# Altium PCB board.PcbDoc
Units mil, origin at the board's own origin, x right, y up, seen from the top; angles counter-clockwise.
Board outline 2617 x 2703.66 mil, 2 copper layers (Top Layer, Bottom Layer); 17 components, 8 nets, 83 pads, 0 vias.
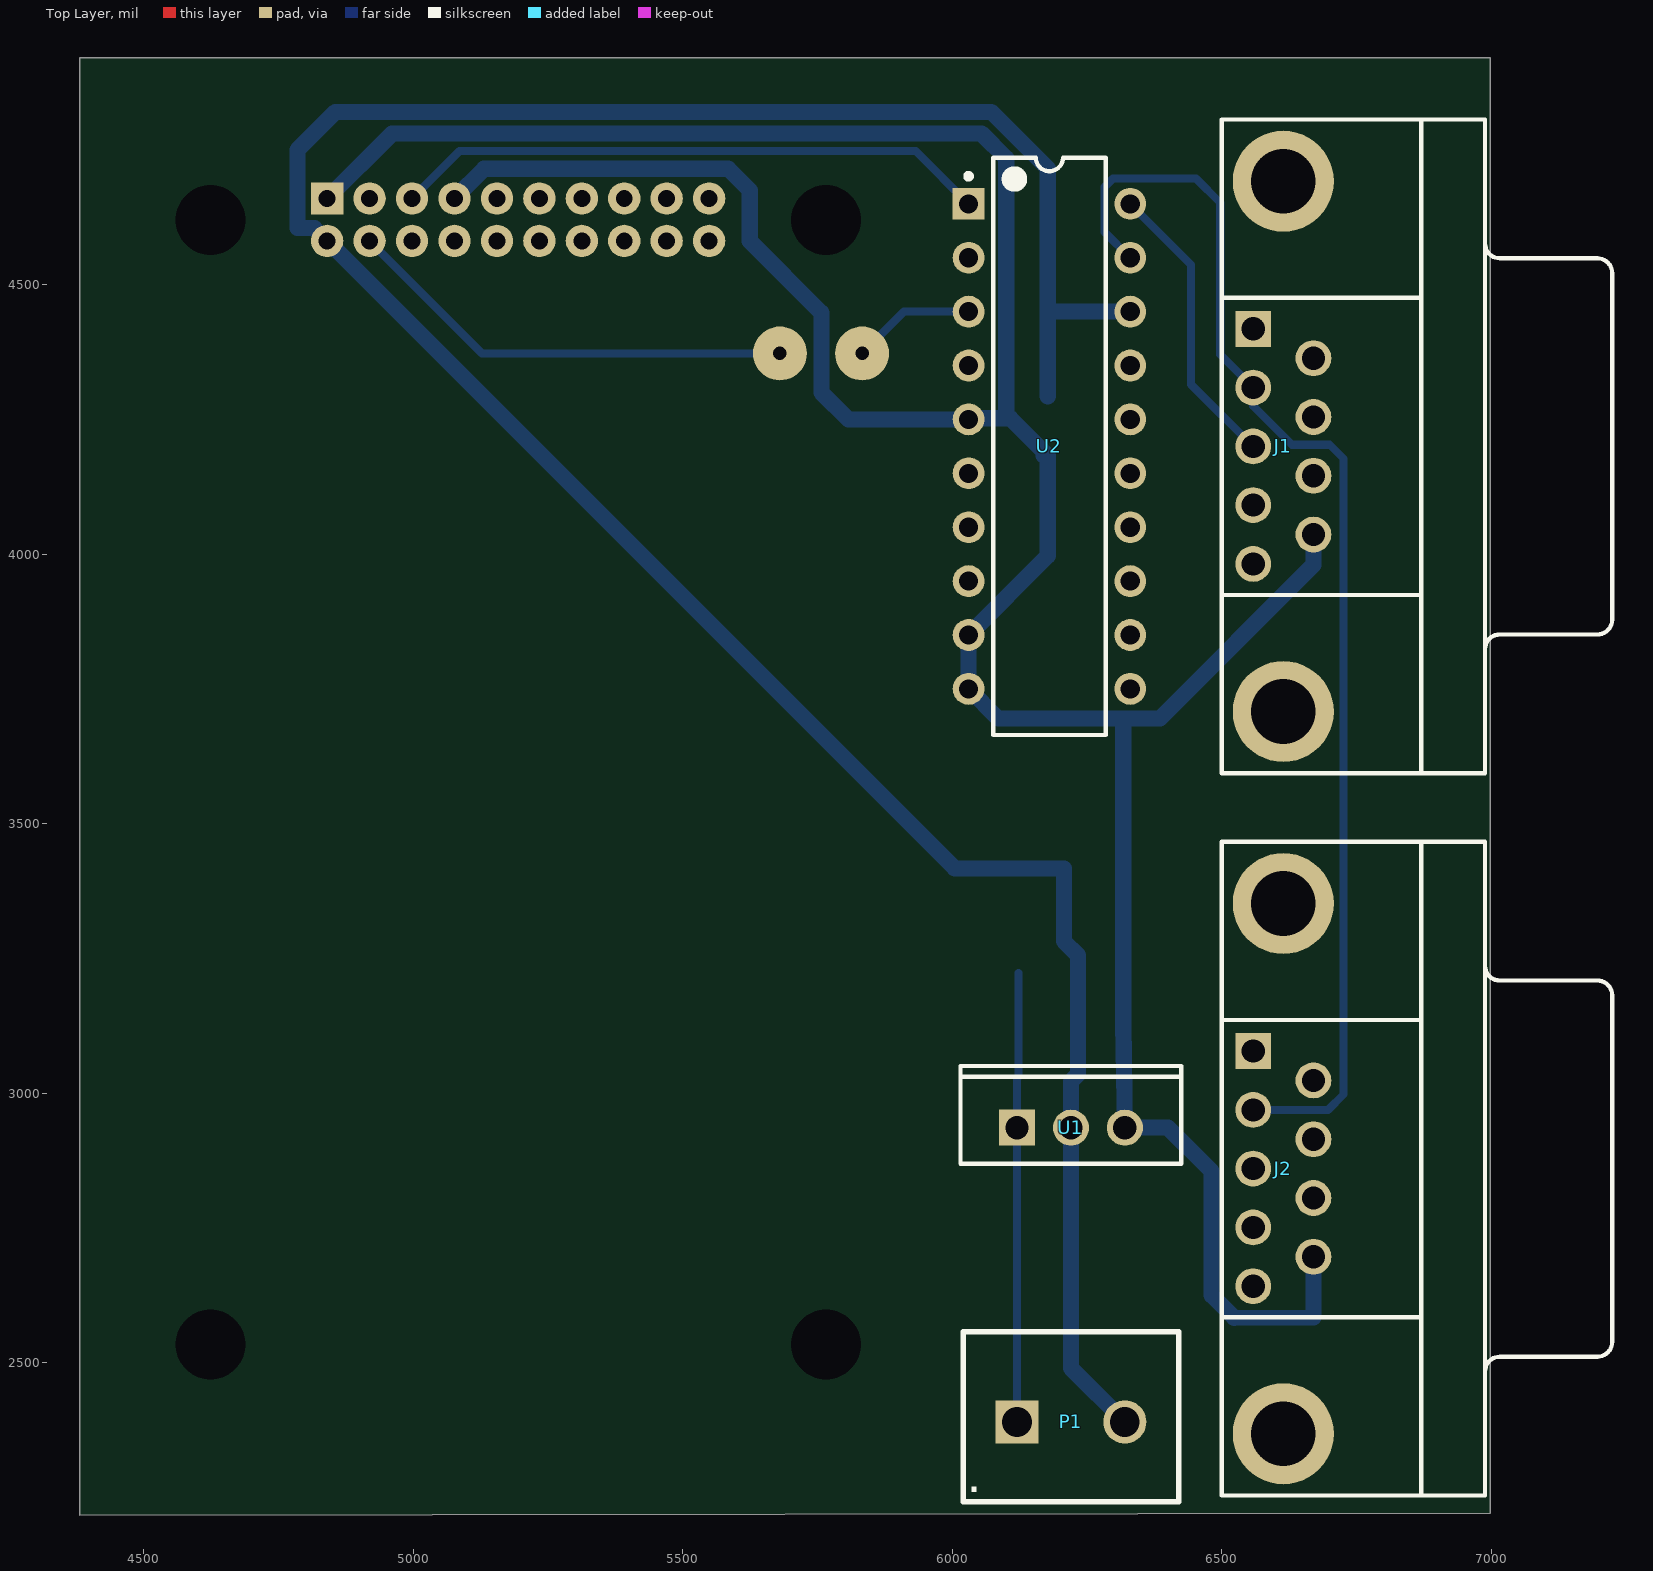
[diagram p0: Top Layer view]
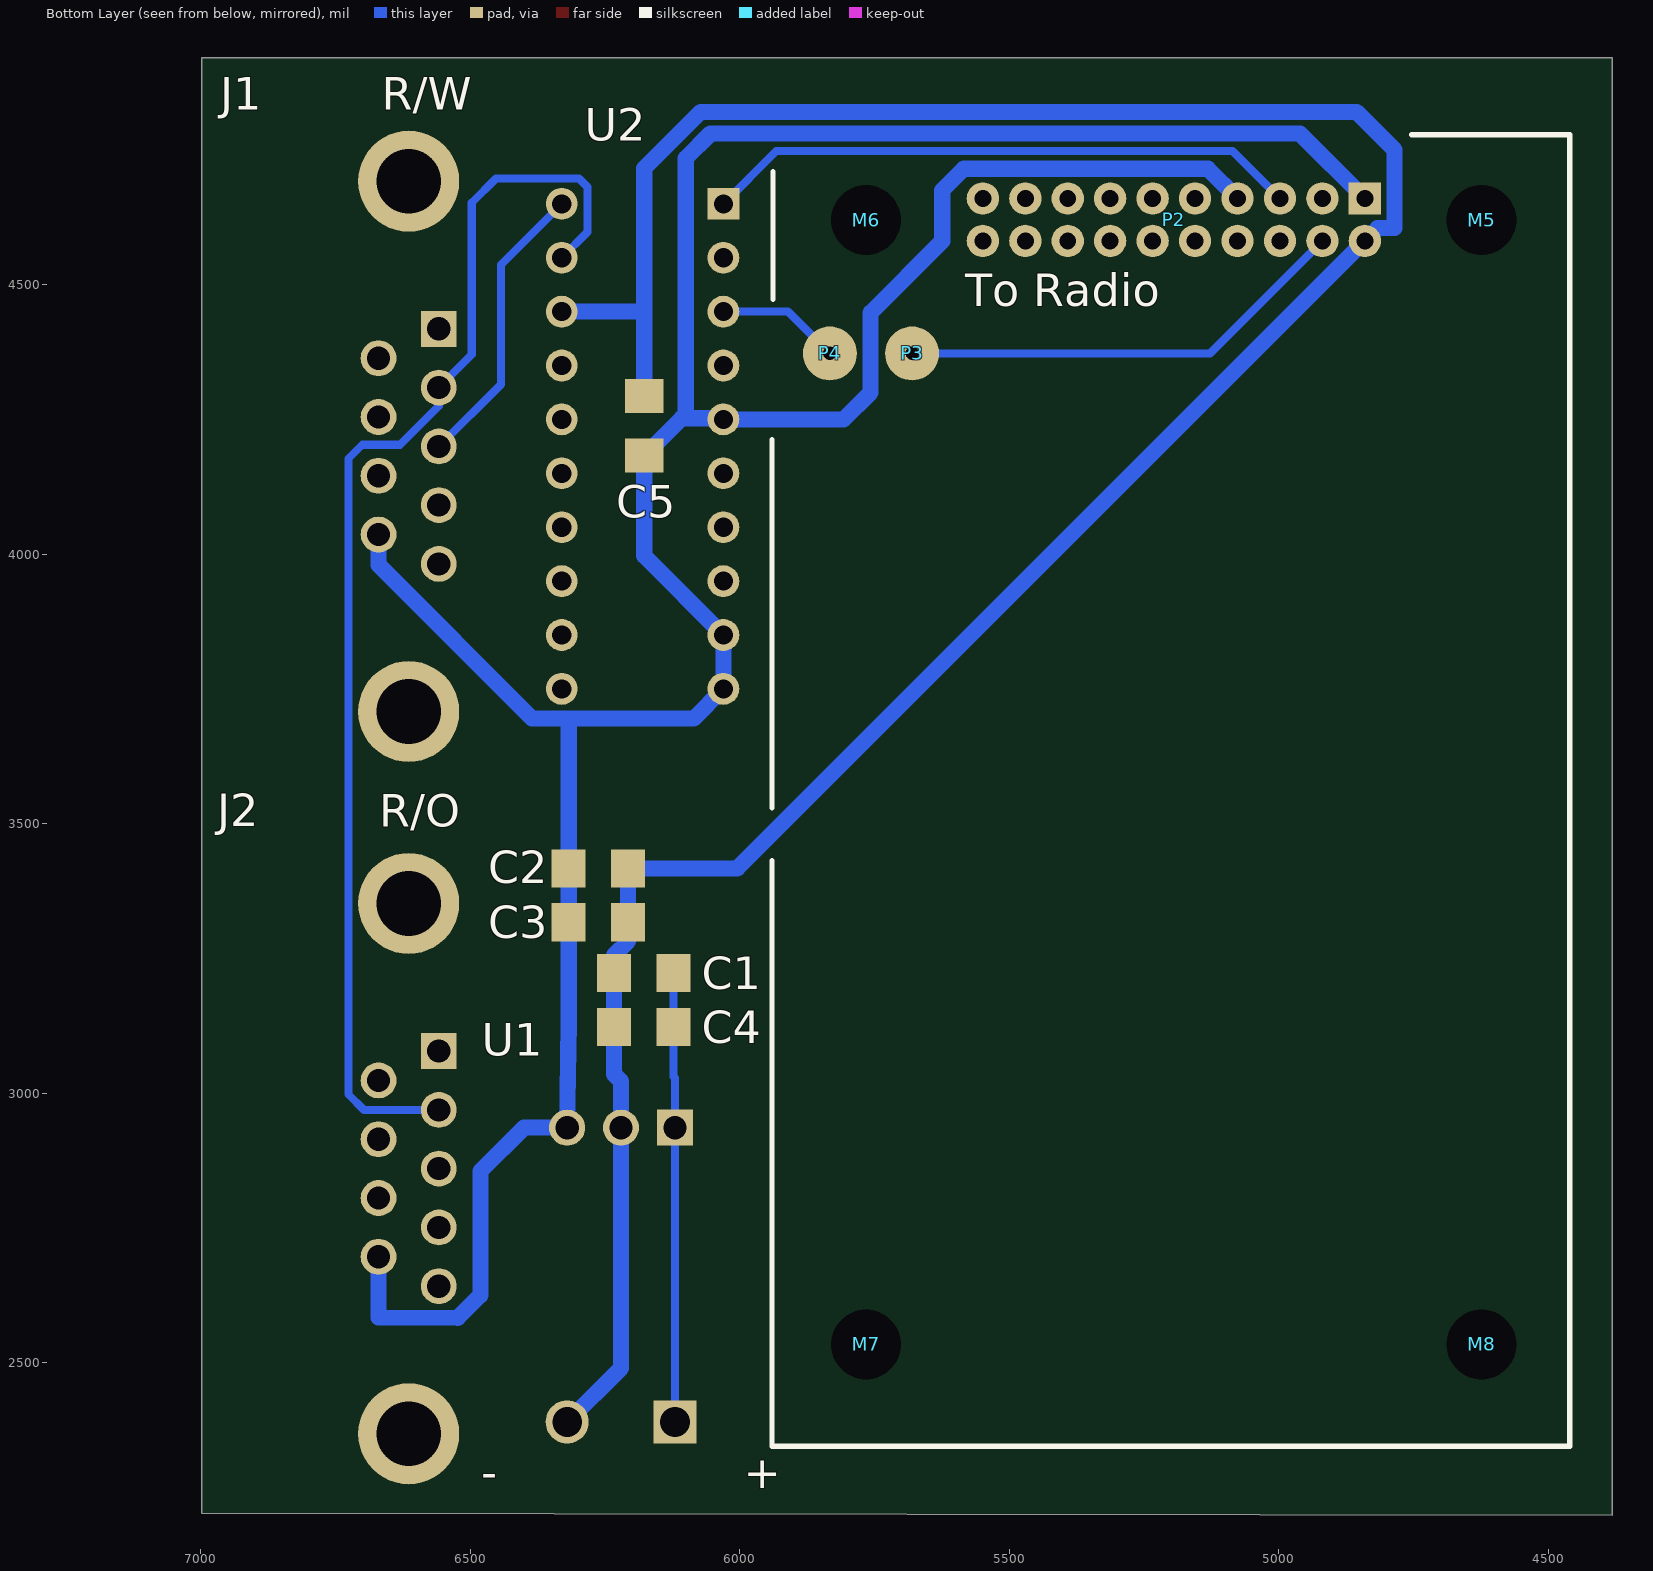
[diagram p1: Bottom Layer view, seen from below]

## Layer stack, top to bottom
Top Layer: signal copper 1.4
Dielectric: dielectric 12.6, FR-4, Dk 4.8
Bottom Layer: signal copper 1.4

## Board outline
6998,4921 6998,2220.8 4381,2217.34 4381,4921

## Design rules (kind name [scope] priority, off if disabled: settings)
Clearance [All] p1: gap=10
HoleSize [All] p1: absolutevalues=TRUE maxlimit=130 minlimit=1 maxpercent=80.000 minpercent=20.000
PolygonConnect [All] p1: connectstyle=Relief reliefconductorwidth=10 reliefentries=4 polygonreliefangle="90 Angle"
RoomDefinition schematic [InComponentClass('schematic')] p1: confinementstyle=ConfineIn formatcopy=TRUE lockcomponents=FALSE outline 7259,2210 4374,2210 4374,4925 7259,4925
RoutingLayers [All] p1: top layer_v5=FALSE bottom layer_v5=TRUE
RoutingVias [All] p1: holewidth=28 width=50 viastyle="Through Hole" minholewidth=28 minwidth=50 maxholewidth=133.86 maxwidth=50
SMDNeckDown [All] p1: percent=50.000
SilkscreenOverComponentPads [All] p1: minsilkscreentomaskgap=10
SolderMaskExpansion [All] p1: expansion=4
Width Width_Power [(InNet('GND') OR InNet('VCC'))] p1: maxlimit=30 minlimit=30 preferedwidth=30
Width [All] p2: maxlimit=15 minlimit=15 preferedwidth=15
25 further rules are at their usual default settings.

## Classes and differential pairs
component class schematic: C1 C2 C3 C4 C5 J1 J2 P1 P2 P3 P4 U1 U2

## Components (designator, comment, footprint, x,y, rotation, side; value= is the part's Value field where it differs from the comment)
C1 "10uF" 1206 6180,3220 r180 bottom
C2 "10uF" 1206 6260,3420 r0 bottom
C3 ".1uF" 1206 6260,3320 r0 bottom
C4 "1uF" 1206 6180,3120 r180 bottom
C5 ".1uF" 1206 6180,4240 r270 bottom
J1 "Read/Write" DE-9 6680,4080 r0 top
J2 "Read Only" DE-9 6680,2740 r0 top
M5 "" "9XTEND Mounting Hole" 4623.46,4620 r180 bottom
M6 "" "9XTEND Mounting Hole" 5765.12,4620 r180 bottom
M7 "" "9XTEND Mounting Hole" 5765.12,2534.02 r180 bottom
M8 "" "9XTEND Mounting Hole" 4623.46,2534.02 r180 bottom
P1 "PWR" "Screw Terminal - 2" 5720,1440 r0 top
P2 "To Radio" "Header 2x20 2mm r&c pitch" 4840,4660 r0 bottom
P3 "" "Solder Pad" 5680,4372.48 r180 bottom
P4 "" "Solder Pad" 5832.48,4372.48 r180 bottom
U1 "L7805CV" TO220ABN 6220,2936 r0 top
U2 "MAX3235ECPP" PP20 6180,4200 r0 top

## Footprints (in the part's own frame and the unit in brackets; to place one, negate y for a bottom-side part, rotate by r counter-clockwise, add the part's x,y. Pads: shape width x height; smd on the part's side, far side on the other; paste and mask are expansions set on the pad)
"9XTEND Mounting Hole" [mm]
  round 0 hole 3.3 unplated: 0(0,0)
1206 [mm] "1206 passive component"
  rect 1.6x1.8 smd: 1(-1.349,0.076) 2(1.451,0.076)
DE-9 [mm] "Serial connector DE-9"
  rect 1.69x1.69 hole 1.092: 1(-3.097,8.588)
  round 1.69 hole 1.092: 2(-3.097,5.818) 3(-3.097,3.048) 4(-3.097,0.278) 5(-3.097,-2.492) 6(-0.257,7.203) 7(-0.257,4.433) 8(-0.257,1.663) 9(-0.257,-1.107)
  round 4.76 hole 3.048: 10(-1.677,15.543) 11(-1.677,-9.447)
  silkscreen extent -4.58,-12.35 13.82,18.45
"Header 2x20 2mm r&c pitch" [mil] "2 row, 20 pin through-hole header with a row and column pitch of 2mm"
  rect 60x60 hole 31.5: 1(0,0)
  round 60 hole 31.5: 2(0,78.74) 3(78.74,0) 4(78.74,78.74) 5(157.48,0) 6(157.48,78.74) 7(236.22,0) 8(236.22,78.74) 9(314.96,0) 10(314.96,78.74) 11(393.7,0) 12(393.7,78.74) 13(472.44,0) 14(472.44,78.74) 15(551.18,0) 16(551.18,78.74) 17(629.92,0) 18(629.92,78.74) 19(708.66,0) 20(708.66,78.74)
PP20 [mm] "DIP, 20-Leads, Row Spacing 7.62mm, Pitch 2.54mm, Body 26.16x7.24mm"
  rect 1.5x1.5 hole 0.9: 1(-3.81,11.43)
  round 1.5 hole 0.9: 2(-3.81,8.89) 3(-3.81,6.35) 4(-3.81,3.81) 5(-3.81,1.27) 6(-3.81,-1.27) 7(-3.81,-3.81) 8(-3.81,-6.35) 9(-3.81,-8.89) 10(-3.81,-11.43) 11(3.81,-11.43) 12(3.81,-8.89) 13(3.81,-6.35) 14(3.81,-3.81) 15(3.81,-1.27) 16(3.81,1.27) 17(3.81,3.81) 18(3.81,6.35) 19(3.81,8.89) 20(3.81,11.43)
  silkscreen extent -3.93,-13.6 2.65,13.6, body extent -3.3,-13.57 3.3,13.57, height 4.58
"Screw Terminal - 2" [mil] "A through-hole screw terminal with two circuits"
  rect 80x80 hole 55.12: 1(400,950)
  round 80 hole 55.12: 2(600,950)
  silkscreen extent 300,802 700,1117, body extent 300,805 700,1115, height 394
"Solder Pad" [mil] "A solder pad for manually jumping traces"
  round 100 hole 25: 1(0,0)
TO220ABN [mm] "TO, Thru-Hole, Vertical, Heatsink Mounted; 3 In-Line Leads; Pitch 2.54 mm; Pin sequence 1, 3, 2"
  rect 1.7x1.7 hole 1.1: 1(-2.54,0)
  round 1.7 hole 1.1: 2(2.54,0) 3(0,0)
  silkscreen extent -5.2,-1.7 5.2,2.9

## Part data
C1 C2 C3 C4 C5: library part Cap, "Capacitor"
J1 J2: library part "D Connector 9", "Receptacle Assembly, 9 Position, Right Angle"
P1: library part "Header 2", "Header, 2-Pin"
P2: library part "Header 20X2", "Header, 20-Pin, Dual row"
P3 P4: library part "Solder Pad", "A pad to solder a wire connection to"
U1: "Positive Voltage Regulator"
U2: "±15kV ESD-Protected, 1µA, 250kbps, 5V, Dual RS-232 Transceiver with Internal Capacitor"

## Nets (pads, with @x,y where several pads share a name; then routed paths per layer and width w, separated by ;. In a path a pad name is that pad's centre, name@x,y a point inside that pad or via, vN(x,y) a via of type N, cw(c..) or ccw(c..) an arc to the next point about the centre after c; other vN are vias at no path point)
GND: C1.1 C2.1 C3.1 C4.1 C5.1 P1.2 P2.2 U1.3 U2.18 | length 5185.7
  Bottom Layer w30: C5.1 6177,4603 6177,4715.66 6072.16,4820.5 4855.5,4820.5 4785,4750 4785,4605 4816.26,4605 P2.2 6004.26,3417 C2.1 C3.1 6206.88,3282.24 6233.12,3256 C1.1 C4.1 6233.12,3035.12 6220,3022 U1.3 6220,2490 P1.2 ; 6179,4450 U2.18 U2.18@6330,4446.12
NetC1_2: C1.2 C4.2 P1.1 U1.1 | length 834.2
  Bottom Layer w15: P1.1 U1.1 6120,3028 6122.88,3030.88 C4.2 C1.2
NetJ1_2: J1.2 J2.2 U2.19 | length 2360.9
  Bottom Layer w15: U2.19 6282,4598 6282,4681 6298.03,4697.03 6451.97,4697.03 6497,4652 6497,4370.13 J1.2 6558.08,4275 6630.08,4203 6700,4203 6726,4177 6726,2998 6697.06,2969.06 J2.2
NetJ1_3: J1.3 U2.20 | length 544.5
  Bottom Layer w15: U2.20 6443,4537 6443,4315.08 J1.3
NetP2_4: P2.4 P3.1 | length 847.7
  Bottom Layer w15: P2.4 5127.52,4372.48 P3.1
NetP2_5: P2.5 U2.1 | length 1109.6
  Bottom Layer w15: P2.5 5085.48,4748 5932,4748 U2.1
NetP4_1: P4.1 U2.3 | length 229.6
  Bottom Layer w15: P4.1 5910,4450 U2.3
VCC: C2.2 C3.2 C5.2 J1.9 J2.9 P2.1 P2.7 U1.2 U2.5 U2.9 U2.10 | length 6539.5
  Bottom Layer w30: P2.1 4960.5,4780.5 6054,4780.5 6100,4734.5 6100,4252.2 ; P2.7 5131.22,4715 5584,4715 5624,4675 5624,4581 5757,4448 5757,4300 5807,4250 U2.5 ; U2.5@6032.2,4252.2 6100,4252.2 ; C5.2@6169.32,4182.88 C5.2 ; 6317.12,3695 C2.2 C3.2 6317.12,3128.88 U1.2 6400,2936 6481,2855 6481,2625 6523,2583 6669.89,2584 J2.9 ; J1.9 6669.89,3979.89 ; 6100,4252.2 6107.68,4252.2 C5.2 ; C5.2 6177,3997 U2.9 U2.10 6085,3695 6385,3695 ; 6385,3695 6669.89,3979.89 ; 6385,3695 6669.89,3979.89
pads on no net: J1.1 J1.4 J1.5 J1.6 J1.7 J1.8 J1.10 J1.11 J2.1 J2.3 J2.4 J2.5 J2.6 J2.7 J2.8 J2.10 J2.11 M5.0 M6.0 M7.0 M8.0 P2.3 P2.6 P2.8 P2.9 P2.10 P2.11 P2.12 P2.13 P2.14 P2.15 P2.16 P2.17 P2.18 P2.19 P2.20 U2.2 U2.4 U2.6 U2.7 U2.8 U2.11 U2.12 U2.13 U2.14 U2.15 U2.16 U2.17

## Silkscreen, mask and mechanical layers (free items; w line width, h text height)
Bottom Overlay:
  lines w10: 4753,4778 4460,4778 4460,2345 5940,2345 5940,3431 ; 5938,4473 5938,4710 ; 5940,3529 5940,4212
  text "R/W" at 6664,4825 h60
  text "To Radio" at 5581,4460 h60
  text "R/O" at 6669,3494 h60
  text "+" at 5992,2267 h60
  text "-" at 6479,2267 h60
Mechanical 1:
  lines w10: 4386.05,2218.55 4386.05,4913.05 4390.3,4917.3 6995.6,4917.3 6999.85,4921.55 6999.85,2222.8 7004.1,2218.55 4386.05,2218.55